# EAGLE board LCD Board (EAGLE 9.6.1)
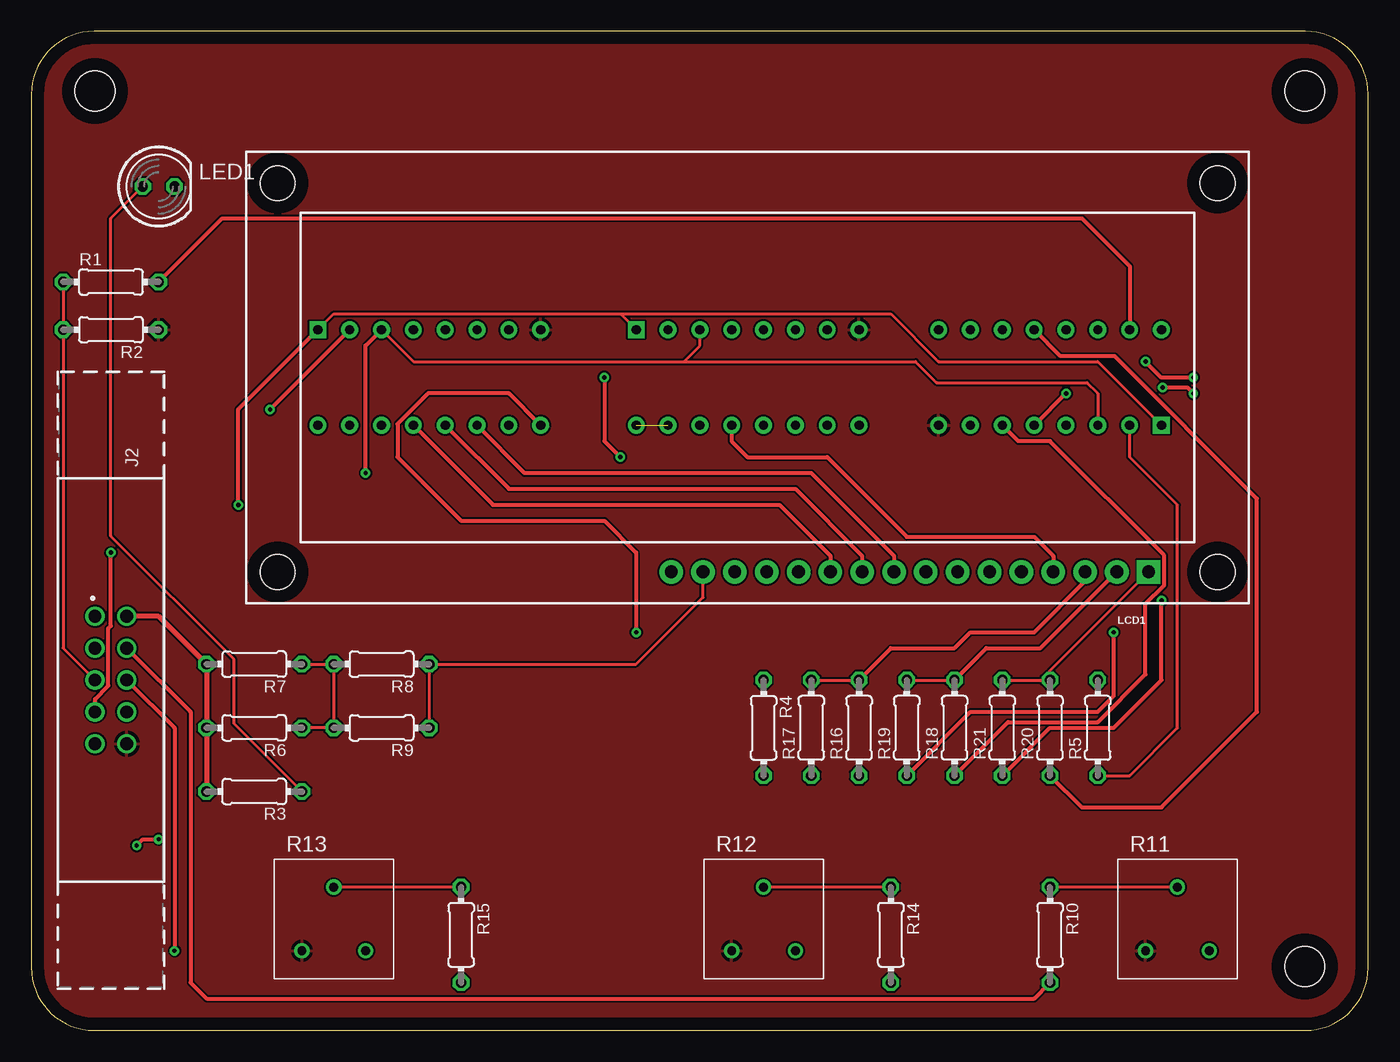
[diagram p0: board, top side]
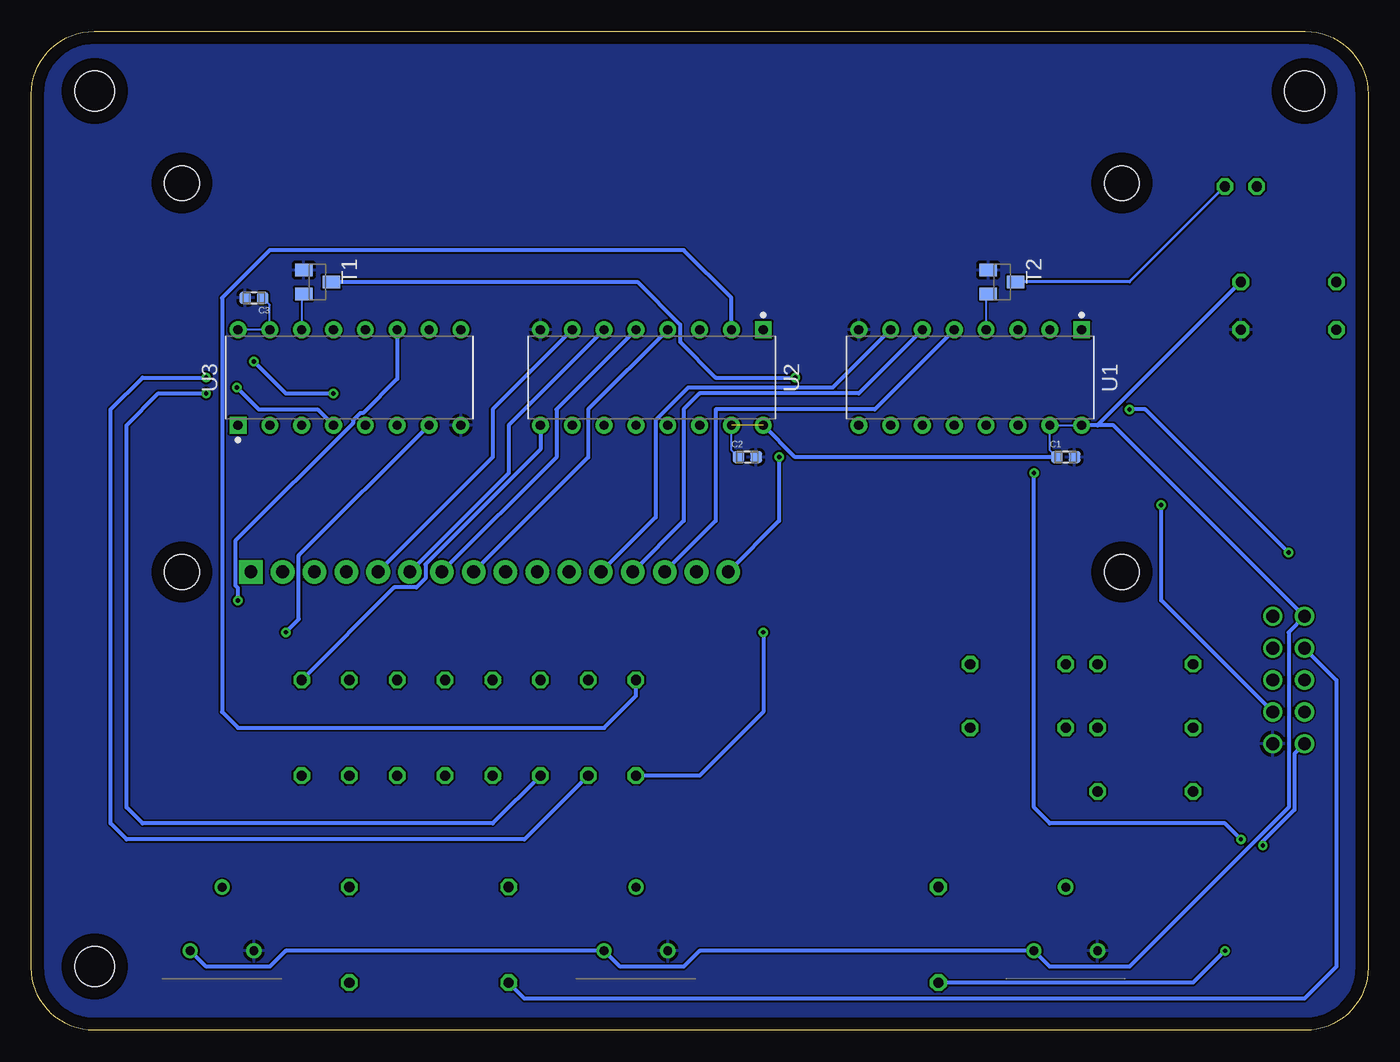
[diagram p1: board, bottom side, seen from below]

Size 106.66 x 79.68 mm. Coordinates in mm from the lower left corner, seen from the top.
Outline: 0,74.68 0,5 arc90 5,0 101.66,0 arc90 106.66,5 106.66,74.68 arc90 101.66,79.68 5,79.68 arc90 0,74.68
Copper layers (1*16): Top 0.035mm / dielectric 1.5mm / Bottom 0.035mm
Design rules "default": minimum track width 6mil, minimum drill 0.35mm, track to track 6mil, track to pad 6mil, pad to pad 6mil, via to via 6mil, smd to smd 6mil, copper to edge 40mil, drill to drill 6mil, minimum pad ring 10mil, minimum via ring 8mil, stop-mask expansion 4mil, vias tented up to drill 0mil, thermal gap 10mil
Holes 3.2 mm at 5.08,74.93 101.6,74.93 101.6,5.08

## Footprints (pad centres in the part's own frame; a part is rotated, then mirrored left to right if it is on the bottom)
CAP_0603 = smd 0.92 x 0.93: 1 -0.705,0; 2 0.705,0
61201022021 = drill 1.02: 1 -5.08,-1.27; 2 -5.08,1.27; 3 -2.54,-1.27; 4 -2.54,1.27; 5 0,-1.27; 6 0,1.27; 7 2.54,-1.27; 8 2.54,1.27; 9 5.08,-1.27; 10 5.08,1.27
LCD-16X2 = drill 1.016 pad 1.88 square: 1 -32,15.5 | drill 1.016 pad 1.88: 2 -29.46,15.5; 3 -26.92,15.5; 4 -24.38,15.5; 5 -21.84,15.5; 6 -19.3,15.5; 7 -16.76,15.5; 8 -14.22,15.5; 9 -11.68,15.5; 10 -9.14,15.5; 11 -6.6,15.5; 12 -4.06,15.5; 13 -1.52,15.5; 14 1.02,15.5; 15 3.56,15.5; 16 6.1,15.5 | hole 2.8: -37.5,15.5; -37.5,-15.5; 37.5,15.5; 37.5,-15.5
LED5MM = drill 0.813 octagon: A -1.27,0; K 1.27,0
0204/7 = drill 0.813 octagon: 1 -3.81,0; 2 3.81,0
3310Y-001-104L-ND = drill 0.71: 1 -2.54,-2.54; 2 0,2.54; 3 2.54,-2.54
SOT23-EBC = smd 1 x 1.4: B 0.95,-1.1; C 0,1.1; E -0.95,-1.1
DIP762W53P254L1969H508Q16B = drill 0.743 pad 1.343 square: 1 -3.81,8.89 | drill 0.743 pad 1.343: 2 -3.81,6.35; 3 -3.81,3.81; 4 -3.81,1.27; 5 -3.81,-1.27; 6 -3.81,-3.81; 7 -3.81,-6.35; 8 -3.81,-8.89; 9 3.81,-8.89; 10 3.81,-6.35; 11 3.81,-3.81; 12 3.81,-1.27; 13 3.81,1.27; 14 3.81,3.81; 15 3.81,6.35; 16 3.81,8.89

## Placement (x,y rotation side)
C1  [CAP_0603]  24.13,45.72 0 bottom
C2  [CAP_0603]  49.53,45.72 0 bottom
C3  [CAP_0603]  88.9,58.42 180 bottom
J2  [61201022021]  6.35,27.94 270 top
LCD1  LCD-16X2SILK  [LCD-16X2]  57.15,52.07 180 top
LED1  [LED5MM]  10.16,67.31 0 top
R1  62K  [0204/7]  6.35,59.69 0 top
R2  6k8  [0204/7]  6.35,55.88 180 top
R3  4k7  [0204/7]  17.78,19.05 180 top
R4  1k  [0204/7]  58.42,24.13 270 top
R5  1k  [0204/7]  85.09,24.13 90 top
R6  4k7  [0204/7]  17.78,24.13 180 top
R7  4k7  [0204/7]  17.78,29.21 180 top
R8  4k7  [0204/7]  27.94,29.21 180 top
R9  4k7  [0204/7]  27.94,24.13 180 top
R10  1k  [0204/7]  81.28,7.62 270 top
R11  [3310Y-001-104L-ND]  91.44,8.89 0 top
R12  [3310Y-001-104L-ND]  58.42,8.89 0 top
R13  [3310Y-001-104L-ND]  24.13,8.89 0 top
R14  1k  [0204/7]  68.58,7.62 270 top
R15  1k  [0204/7]  34.29,7.62 270 top
R16  100k  [0204/7]  66.04,24.13 90 top
R17  100k  [0204/7]  62.23,24.13 90 top
R18  100k  [0204/7]  73.66,24.13 90 top
R19  100k  [0204/7]  69.85,24.13 90 top
R20  100k  [0204/7]  81.28,24.13 90 top
R21  100k  [0204/7]  77.47,24.13 90 top
T1  [SOT23-EBC]  83.82,59.69 270 bottom
T2  [SOT23-EBC]  29.21,59.69 270 bottom
U1  [DIP762W53P254L1969H508Q16B]  31.75,52.07 270 bottom
U2  [DIP762W53P254L1969H508Q16B]  57.15,52.07 270 bottom
U3  [DIP762W53P254L1969H508Q16B]  81.28,52.07 90 bottom

## Library data of the parts
C1-C3 = Resistor_Capacitor; CREATED_BY: PCBLayout.com; DIGIKEY_PART_NUMBER: 311-1069-2-ND; MANUFACTURER: Yageo; MPN: CC0603JRNPO9BN101; PACKAGE: SMD 0603
J2 = Wurth_Connectors_WR-BHD; CONTACT-RESISTANCE: 20mOhm; DATASHEET-URL: https://katalog.we-online.com/em/datasheet/61201022021.pdf; GENDER: Male; IR: 3A; L: 32mm; MATES: WR-BHD 2.54mm Female IDC Connector with Strain Relief; MOUNT: THT; PACKAGING: Tray; PART-NUMBER: 61201022021; PINS: 10; PITCH: 2.54mm; TOL-R: max.; TYPE: Straight; WORKING-VOLTAGE: 250V(AC)
LCD1 = SparkFun-Displays; SF_ID: LCD-00255
LED1 = led
R1-R10 R14-R21 = rcl; SPICEPREFIX: R
R11-R13 = Potentiometer_Trimmers; CREATED_BY: PCBLayout.com; DIGIKEY_PARTNO: 3310Y-001-104L-ND; MANUFACTURER: Bourns Inc.; MPN: 3310Y-001-104L
T1 T2 = transistor
U1-U3 = 74hc4094

## Nets
5V: C1.1 C2.1 C3.1 J2.1 R1.2 R11.3 R12.3 R13.3 U1.15 U1.16 U2.15 U2.16 U3.15 U3.16
CLK: J2.9 U1.3 U2.3 U3.3
COM1: LCD1.3 R16.2 R17.2
COM2: LCD1.2 R18.2 R19.2
COM3: LCD1.1 R20.2 R21.2
DATA: J2.7 U1.2
GND: C1.2 C2.2 C3.2 J2.10 R2.1 R11.1 R12.1 R13.1 T1.E T2.E U1.8 U2.8 U3.8
LCD_A: LCD1.15 R8.1 R9.1
LCD_K: T1.B U3.14
N$1: J2.5 R1.1 R2.2
N$2: LCD1.16 T1.C
N$3: LED1.A R3.1
N$4: LED1.K T2.C
N$5: T2.B U1.4
N$6: R4.2 U1.9
N$7: R4.1 U2.2
N$8: R5.2 U2.9
N$9: R5.1 U3.2
N$11: R6.1 R7.1 R8.2 R9.2
N$12: R10.1 R11.2
N$14: R12.2 R14.1
N$16: R13.2 R15.1
POT1: J2.4 R10.2
POT2: J2.3 R14.2
POT3: J2.6 R15.2
Q1: R16.1 U3.4
Q2: R17.1 U3.5
Q3: R18.1 U3.6
Q4: R19.1 U3.7
Q7: R20.1 U3.12
Q8: R21.1 U3.11
SEG_1: LCD1.14 U1.5
SEG_2: LCD1.13 U1.6
SEG_3: LCD1.12 U1.7
SEG_4: LCD1.11 U1.13
SEG_5: LCD1.10 U1.12
SEG_6: LCD1.9 U1.11
SEG_7: LCD1.8 U2.4
SEG_8: LCD1.7 U2.5
SEG_9: LCD1.6 U2.6
SEG_10: LCD1.5 U2.7
SEG_11: LCD1.4 U2.13
TRIGGER: J2.8 U1.1 U2.1 U3.1
VCC: J2.2 R3.2 R6.2 R7.2

## Tracks (layer width: path | path; a pad name or v marks a point on that pad's centre or on a via)
5V  (1 unrouted)
  Top 0.305: R1.2 15.24,64.77 83.82,64.77 87.63,60.96 U3.15
  Bottom 0.152: C2.1 50.8,46.28 U2.15 | C1.1 25.4,46.28 U1.15 U1.16 | U3.16 U3.15 87.63,57.85 C3.1
  Bottom 0.305: R11.3 92.71,5.08 87.63,5.08 86.36,6.35 R12.3 59.69,5.08 54.61,5.08 53.34,6.35 R13.3 25.4,5.08 19.05,5.08 6.35,17.78 6.35,31.75 J2.1 20.32,48.26 U1.16 21.59,48.26 R1.2 | C1.1 45.72,45.72 U2.16
CLK  (via drill 0.35)
  Top 0.254: U1.3 30.48,53.34 52.07,53.34 | 52.07,53.34 53.34,54.61 U2.3 | 52.07,53.34 70.55,53.34 72.22,51.66 84.23,51.66 85.09,50.8 U3.3
  Top 0.305: v8.41,14.76 8.89,15.24 v10.16,15.24 | v26.67,44.45 26.67,54.61 U1.3
  Bottom 0.305: J2.9 5.89,22.05 5.89,17.59 8.41,15.08 v8.41,14.76 | v10.16,15.24 11.43,16.51 25.4,16.51 26.67,17.78 v26.67,44.45
COM1
  Top 0.254: R17.2 R16.2
  Top 0.305: R16.2 68.58,30.48 73.66,30.48 74.93,31.75 80.01,31.75 84.07,35.81 LCD1.3
COM2
  Top 0.254: R19.2 R18.2
  Top 0.305: R18.2 76.2,30.48 80.52,30.48 LCD1.2
COM3
  Top 0.254: R21.2 R20.2 81.28,28.7 LCD1.1
DATA  (via drill 0.35)
  Top 0.305: J2.7 5.08,26.43 6.15,27.5 6.15,32.06 6.35,32.26 v6.35,38.1 | v19.05,49.53 U1.2
  Bottom 0.305: v6.35,38.1 17.78,49.53 v19.05,49.53
GND
  pour Top: 0,80.01 0,0 106.68,0 106.68,80.01
  pour Bottom: 0,80.01 0,0 106.68,0 106.68,80.01
LCD_A
  Top 0.254: R9.1 R8.1 48.26,29.21 53.59,34.54 LCD1.15
LCD_K
  Bottom 0.152: T1.B 85.09,58.57 U3.14
N$1
  Top 0.254: R1.1 R2.2 2.54,30.48 J2.5
N$2  (via drill 0.35)
  Top 0.305: v45.72,52.07 45.72,46.99 v46.99,45.72
  Bottom 0.305: T1.C 58.31,59.69 54.9,56.28 54.9,54.9 52.07,52.07 v45.72,52.07 | v46.99,45.72 46.99,40.63 LCD1.16
N$3
  Top 0.254: R3.1 16.18,24.46 16.18,29.6 6.35,39.43 6.35,64.77 LED1.A
N$4
  Bottom 0.254: LED1.K 19.05,59.69 T2.C
N$5
  Bottom 0.152: T2.B 30.48,58.57 U1.4
N$6  (via drill 0.35)
  Top 0.305: U1.9 38.1,50.8 31.64,50.8 29.21,48.37 29.21,45.72 34.29,40.64 45.72,40.64 48.26,38.1 v48.26,31.75
  Bottom 0.305: v48.26,31.75 48.26,25.4 53.34,20.32 R4.2
N$7
  Bottom 0.305: U2.2 50.8,58.42 54.61,62.23 87.63,62.23 91.44,58.42 91.44,25.4 90.17,24.13 60.96,24.13 58.42,26.67 R4.1
N$8
  Bottom 0.305: R5.2 77.7,35.33 75.93,35.33 75.2,36.05 75.2,37.17 66.04,46.33 U2.9
N$9
  Top 0.254: R5.1 87.63,20.32 91.44,24.13 91.44,41.91 87.63,45.72 U3.2
N$11
  Top 0.254: R7.1 R8.2 R9.2 R6.1
N$12
  Top 0.254: R11.2 R10.1
N$14
  Top 0.254: R14.1 R12.2
N$16
  Top 0.254: R15.1 R13.2
POT1
  Top 0.305: J2.4 12.7,25.4 12.7,3.81 13.97,2.54 80.01,2.54 R10.2
POT2
  Bottom 0.305: J2.3 2.54,27.94 2.54,5.08 5.08,2.54 67.31,2.54 R14.2
POT3  (via drill 0.35)
  Top 0.305: J2.6 11.43,24.13 v11.43,6.35
  Bottom 0.305: R15.2 13.97,3.81 v11.43,6.35
Q1  (via drill 0.35)
  Top 0.305: v90.27,51.28 92.23,51.28 v92.71,50.8
  Bottom 0.305: R16.1 69.85,16.51 97.79,16.51 99.06,17.78 99.06,48.26 96.52,50.8 v92.71,50.8 | v90.27,51.28 88.52,49.53 83.82,49.53 U3.4
Q2  (via drill 0.35)
  Top 0.305: v92.71,52.07 90.17,52.07 v88.9,53.34 | v82.55,50.8 U3.5
  Bottom 0.305: R17.1 67.31,15.24 99.06,15.24 100.33,16.51 100.33,49.53 97.79,52.07 v92.71,52.07 | v88.9,53.34 86.36,50.8 v82.55,50.8
Q3
  Top 0.305: R18.1 77.93,24.59 85.09,24.59 88.9,28.4 88.9,34.01 90.39,35.5 90.39,37.88 81.28,46.99 78.74,46.99 U3.6
Q4  (via drill 0.35)
  Top 0.305: v86.36,31.75 86.36,26.67 85.09,25.4 74.93,25.4 R19.1
  Bottom 0.305: v86.36,31.75 85.31,32.8 85.31,37.88 U3.7
Q7
  Top 0.305: R20.1 83.82,17.78 90.17,17.78 97.79,25.4 97.79,42.41 86.43,53.77 82.12,53.77 U3.12
Q8  (via drill 0.35)
  Top 0.305: R21.1 81.28,24.13 86.36,24.13 90.17,27.94 v90.17,34.29
  Bottom 0.305: v90.17,34.29 90.17,35.28 90.39,35.5 90.39,39.03 80.99,48.44 80.99,48.66 80.41,49.24 80.19,49.24 77.47,51.96 U3.11
SEG_1
  Bottom 0.305: U1.5 39.37,49.53 52.07,49.53 52.07,40.63 LCD1.14
SEG_2
  Bottom 0.305: U1.6 40.64,50.8 53.34,50.8 54.61,49.53 54.61,40.63 LCD1.13
SEG_3
  Bottom 0.305: U1.7 42.72,51.26 54.26,51.26 56.86,48.66 56.86,40.92 LCD1.12
SEG_4
  Top 0.305: U1.13 36.83,41.91 59.69,41.91 63.75,37.85 LCD1.11
SEG_5
  Top 0.305: U1.12 38.1,43.18 60.96,43.18 66.29,37.85 LCD1.10
SEG_6
  Top 0.305: U1.11 39.37,44.45 62.23,44.45 68.83,37.85 LCD1.9
SEG_7
  Bottom 0.305: U2.4 62.23,49.53 62.23,45.71 LCD1.8
SEG_8
  Bottom 0.305: U2.5 64.77,49.53 64.77,45.71 LCD1.7
SEG_9
  Bottom 0.305: U2.6 68.58,48.26 68.58,44.44 LCD1.6
SEG_10
  Bottom 0.305: U2.7 69.85,49.53 69.85,45.72 LCD1.5
SEG_11
  Top 0.305: U2.13 55.88,46.99 57.15,45.72 63.5,45.72 69.85,39.37 80.01,39.37 81.53,37.85 LCD1.4
TRIGGER  (via drill 0.35)
  Top 0.254: U1.1 24.13,57.15 46.99,57.15 | 46.99,57.15 U2.1 | 46.99,57.15 68.58,57.15 72.39,53.34 85.09,53.34 U3.1
  Top 0.305: v16.51,41.91 16.51,49.53 U1.1
  Bottom 0.305: J2.8 16.51,34.29 v16.51,41.91
VCC
  Top 0.406: J2.2 10.16,33.02 R7.2 R6.2 R3.2